# Altium PCB xlrconn.PCBDOC
Units mil, origin at the board's own origin, x right, y up, seen from the top; angles counter-clockwise.
Board outline 2020 x 3120 mil, 2 copper layers (Top Layer, Bottom Layer); 21 components, 21 nets, 72 pads, 1 vias.
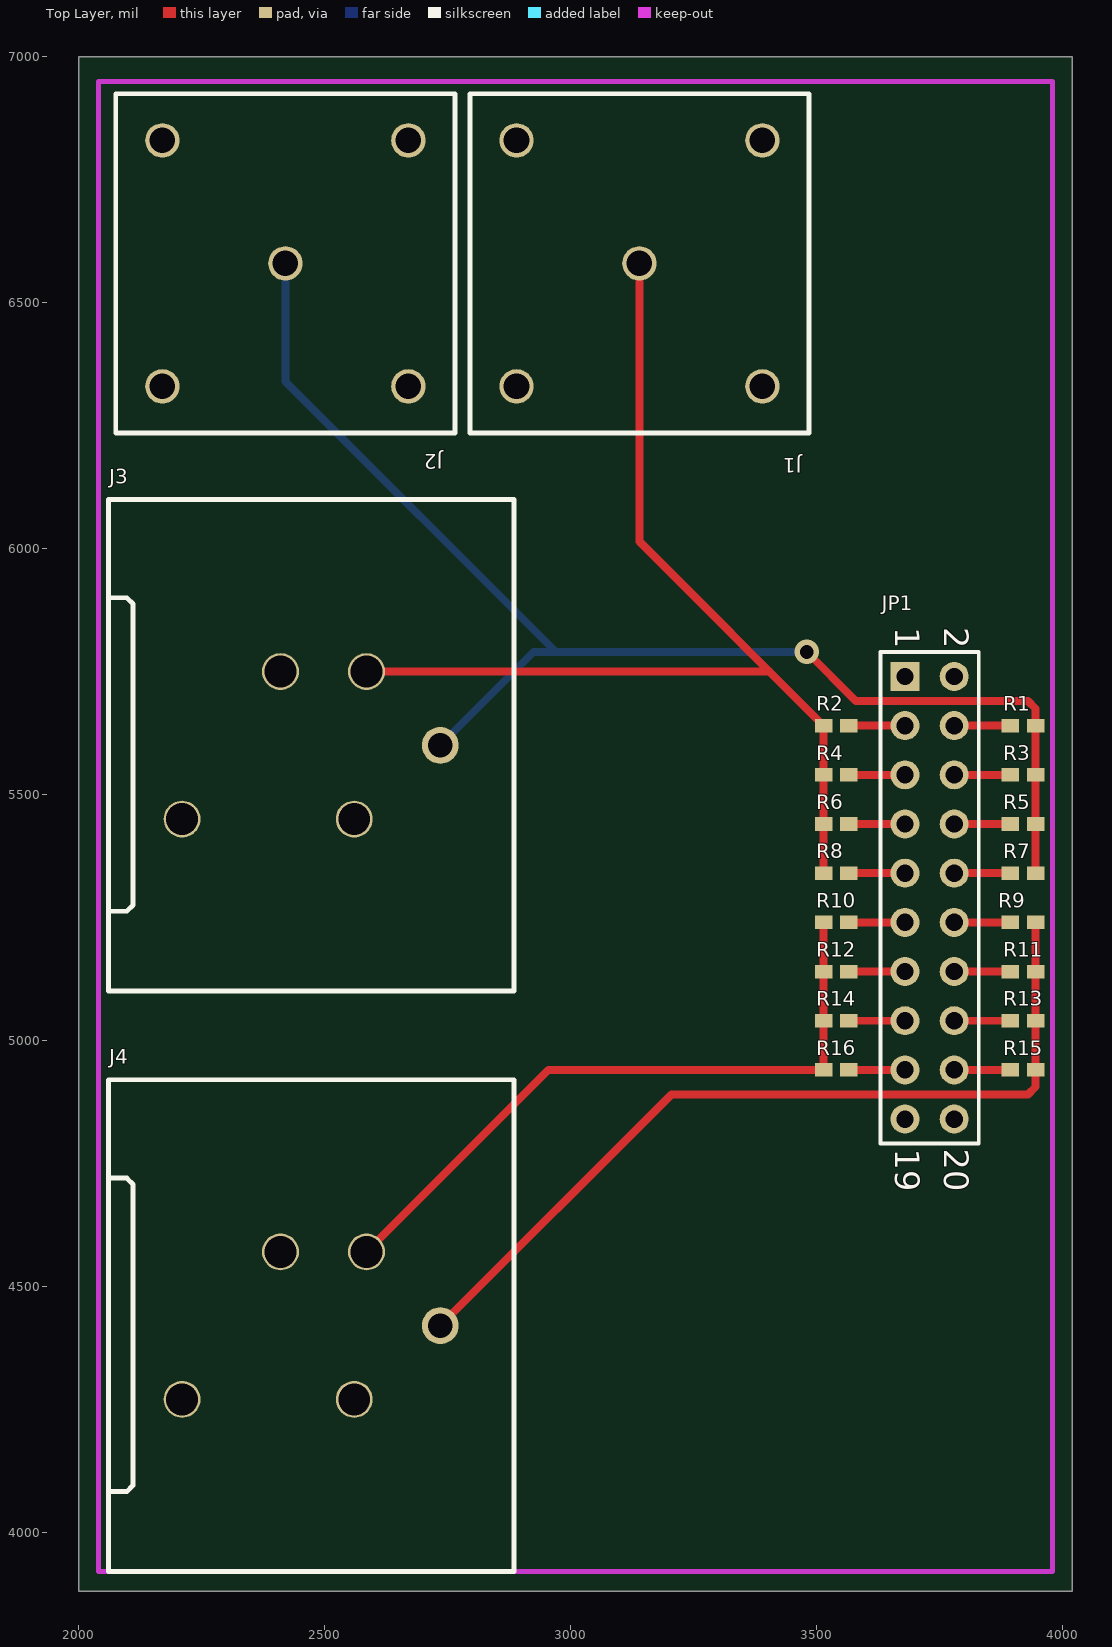
[diagram p0: Top Layer view]
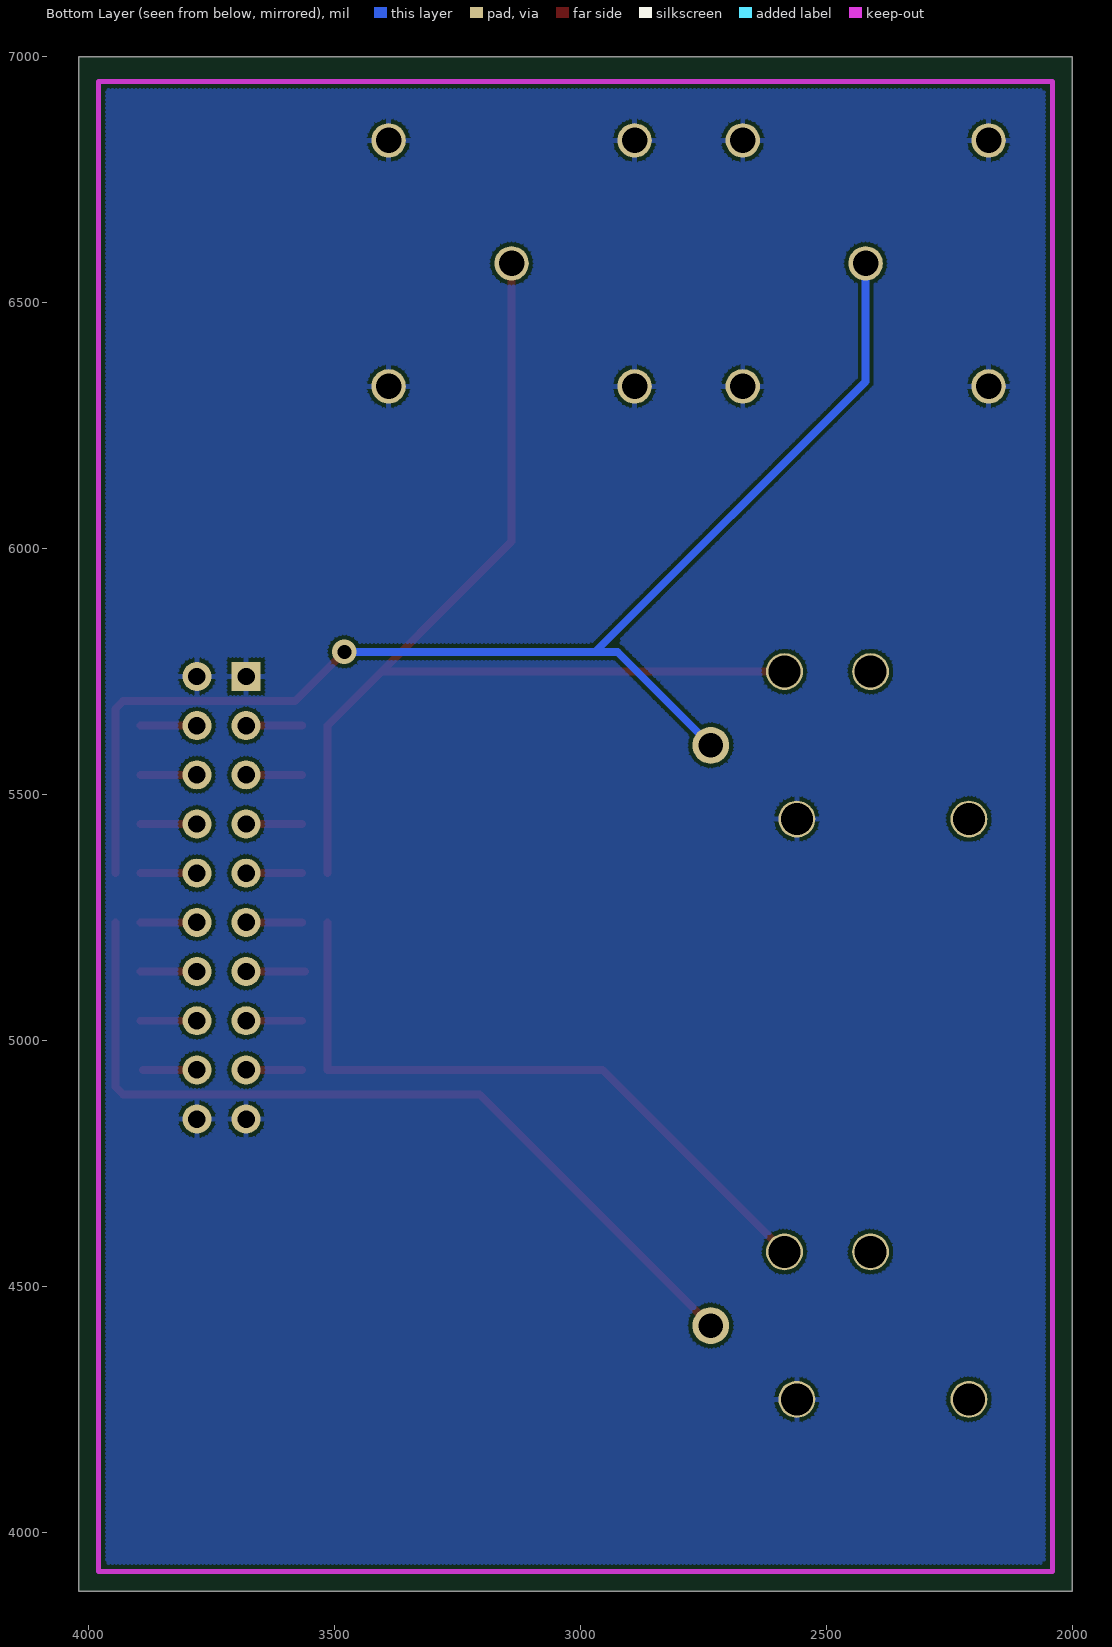
[diagram p1: Bottom Layer view, seen from below]

## Layer stack, top to bottom
Top Layer: signal copper 1.4
Dielectric: dielectric 12.6, FR-4, Dk 4.8
Bottom Layer: signal copper 1.4

## Board outline
2000,3880 4020,3880 4020,7000 2000,7000

## Design rules (kind name [scope] priority, off if disabled: settings)
Clearance [All] p1: gap=8
ComponentClearance [All] p1: gap=10 collisioncheckmode=0 verticalgap=10
PolygonConnect [All] p1: connectstyle=Relief reliefconductorwidth=10 reliefentries=4 polygonreliefangle="90 Angle"
RoomDefinition xlrconn [InComponentClass('xlrconn')] p1: confinementstyle=ConfineIn formatcopy=TRUE lockcomponents=FALSE outline 3820,6688 3740,6688 3740,4400 3820,4400
RoutingVias [All] p1: holewidth=28 width=50 viastyle="Through Hole" minholewidth=28 minwidth=50 maxholewidth=28 maxwidth=50
SolderMaskExpansion [All] p1: expansion=4
TestPointUsage [All] p1: valid=0 allowmultiple=FALSE
Testpoint [All] p1: side=15 testpointundercomponent=TRUE minsize=40 maxsize=100 preferedsize=60 minholesize=0 maxholesize=40 preferedholesize=32 testpointgrid=1 style=1023 order=0-123456789
Width [All] p1: maxlimit=50 minlimit=8 preferedwidth=8 toplayer_prefwidth=16 bottomlayer_prefwidth=16 minimp=50.000000 maximp=50.000000 favimp=50.000000
17 further rules are at their usual default settings.

## Components (designator, comment, footprint, x,y, rotation, side; value= is the part's Value field where it differs from the comment)
J1 "Vertical BNC" "Vertical BNC 227699-1" 3140,6580 r0 top
J2 "Vertical BNC" "Vertical BNC 227699-1" 2420,6580 r0 top
J3 "XLR connector" NC3FAH-0 2060,5600 r90 top
J4 "XLR connector" NC3FAH-0 2060,4420 r90 top
JP1 "Header 10X2" HDR2X10 3680,5740 r270 top
R1 "0" CR1005-0402 3920,5640 r180 top
R2 "0" CR1005-0402 3540,5640 r180 top
R3 "0" CR1005-0402 3920,5540 r180 top
R4 "0" CR1005-0402 3540,5540 r180 top
R5 "0" CR1005-0402 3920,5440 r180 top
R6 "0" CR1005-0402 3540,5440 r180 top
R7 "0" CR1005-0402 3920,5340 r180 top
R8 "0" CR1005-0402 3540,5340 r180 top
R9 "0" CR1005-0402 3920,5240 r180 top
R10 "0" CR1005-0402 3540,5240 r180 top
R11 "0" CR1005-0402 3920,5140 r180 top
R12 "0" CR1005-0402 3540,5140 r180 top
R13 "0" CR1005-0402 3920,5040 r180 top
R14 "0" CR1005-0402 3540,5040 r180 top
R15 "0" CR1005-0402 3920,4940 r180 top
R16 "0" CR1005-0402 3540,4940 r180 top

## Footprints (in the part's own frame and the unit in brackets; to place one, negate y for a bottom-side part, rotate by r counter-clockwise, add the part's x,y. Pads: shape width x height; smd on the part's side, far side on the other; paste and mask are expansions set on the pad)
CR1005-0402 [mm] "Chip Resistor; Body 1.1 x 0.5 mm (LxW typ)"
  rect 0.9x0.7 smd: 1(-0.65,0) 2(0.65,0)
HDR2X10 [mm]
  rect 1.5x1.5 hole 0.9: 1(0,0)
  round 1.5 hole 0.9: 2(0,2.54) 3(2.54,0) 4(2.54,2.54) 5(5.08,0) 6(5.08,2.54) 7(7.62,0) 8(7.62,2.54) 9(10.16,0) 10(10.16,2.54) 11(12.7,0) 12(12.7,2.54) 13(15.24,0) 14(15.24,2.54) 15(17.78,0) 16(17.78,2.54) 17(20.32,0) 18(20.32,2.54) 19(22.86,0) 20(22.86,2.54)
  silkscreen extent -1.27,-1.27 24.13,3.81
NC3FAH-0 [mil] "Neutrik 3 pole female XLR receptacle, plastic housing, horizontal PCB mount."
  round 75 hole 65: 0(-150,-150) 0(150,-350) 1(-150,-500) 2(150,-525)
  round 75 hole 50: 3(0,-675)
  silkscreen extent -500,-825 500,0
"Vertical BNC 227699-1" [mil] "AMP vertical BNC 227699-1"
  round 70 hole 52: 1(0,0) 2(250,250) 3(-250,250) 4(-250,-250) 5(250,-250)
  silkscreen extent -345,-345 345,345

## Part data
J1 J2: library part VERTBNC, "Vertical BNC with correct grounding pin behavior"
J3 J4: library part XLR, "XLR balanced connector, standard"
JP1: "Header, 10-Pin, Dual row"
R1 R2 R3 R4 R5 R6 R7 R8 R9 R10 R11 R12 R13 R14 R15 R16: library part Res1, "Resistor"

## Via types
v1: diameter 50, hole 28, Top Layer to Bottom Layer, 1 vias

## Nets (pads, with @x,y where several pads share a name; then routed paths per layer and width w, separated by ;. In a path a pad name is that pad's centre, name@x,y a point inside that pad or via, vN(x,y) a via of type N, cw(c..) or ccw(c..) an arc to the next point about the centre after c; other vN are vias at no path point)
A+: J1.1 J3.2 R2.2 R4.2 R6.2 R8.2 | length 2214.5
  Top Layer w16: J3.2 3404.41,5750 ; J1.1 3140,6014.41 R2.2 R8.2
A-: J2.1 J3.3 R1.1 R3.1 R5.1 R7.1 | length 2689.4
  Top Layer w16: v1(3480,5790) 3580,5690 3930,5690 3945.59,5674.41 R7.1
  Bottom Layer w16: J2.1 2420,6340 2970,5790 ; J3.3 2925,5790 v1(3480,5790)
B+: J4.2 R10.2 R12.2 R14.2 R16.2 | length 1382.7
  Top Layer w16: J4.2 2955,4940 R16.2 R10.2
B-: J4.3 R9.1 R11.1 R13.1 R15.1 | length 1746.1
  Top Layer w16: J4.3 3205,4890 3930,4890 3945.59,4905.59 R9.1
GND: J1.2 J1.3 J1.4 J1.5 J2.2 J2.3 J2.4 J2.5 J3.1 J4.1 JP1.1 JP1.2 JP1.19 JP1.20
NetJP1_3: JP1.3 R2.1 | length 114.4
  Top Layer w16: R2.1 JP1.3
NetJP1_4: JP1.4 R1.2 | length 114.4
  Top Layer w16: JP1.4 R1.2
NetJP1_5: JP1.5 R4.1 | length 114.4
  Top Layer w16: R4.1 JP1.5
NetJP1_6: JP1.6 R3.2 | length 124.4
  Top Layer w16: JP1.6@3770,5540 R3.2
NetJP1_7: JP1.7 R6.1 | length 124.4
  Top Layer w16: R6.1 JP1.7@3690,5440
NetJP1_8: JP1.8 R5.2 | length 114.4
  Top Layer w16: JP1.8 R5.2
NetJP1_9: JP1.9 R8.1 | length 114.4
  Top Layer w16: R8.1 JP1.9
NetJP1_10: JP1.10 R7.2 | length 114.4
  Top Layer w16: JP1.10 R7.2
NetJP1_11: JP1.11 R10.1 | length 114.4
  Top Layer w16: R10.1 JP1.11
NetJP1_12: JP1.12 R9.2 | length 114.4
  Top Layer w16: JP1.12 R9.2
NetJP1_13: JP1.13 R12.1 | length 120
  Top Layer w16: R12.1@3560,5140 JP1.13
NetJP1_14: JP1.14 R11.2 | length 114.4
  Top Layer w16: JP1.14 R11.2
NetJP1_15: JP1.15 R14.1 | length 124.4
  Top Layer w16: R14.1 JP1.15@3690,5040
NetJP1_16: JP1.16 R13.2 | length 114.4
  Top Layer w16: JP1.16 R13.2
NetJP1_17: JP1.17 R16.1 | length 114.4
  Top Layer w16: R16.1 JP1.17
NetJP1_18: JP1.18 R15.2 | length 110
  Top Layer w16: JP1.18 R15.2@3890,4940
pads on no net: J3.0 J4.0

## Polygon pours and split planes (outlines as drawn)
GND on Bottom Layer (hatched 90Degree grid 8 track 8, remove dead copper): 3980,6950 3980,3920 2040,3920 2040,6950

## Keep-outs
Keep-Out Layer:
  lines w10: 2040,3920 2040,6950 3980,6950 3980,3920 2040,3920

## Other copper
Top Layer:
  text "Layer 1" at 4400,4770 h60
Bottom Layer:
  text "Layer 2" at 4390,4670 h60

## Silkscreen, mask and mechanical layers (free items; w line width, h text height)
Mechanical 5:
  the board outline again, w1
Drill Drawing:
  text ".LEGEND" at 6200,3200 h60
  text "Drill Drawing." at 6200,3100 h60

## Dimensions
2040,3920 to 3980,3920 on Mechanical 1
2040,3920 to 2040,6950 on Mechanical 1

## Text inside footprints (layer, text, board x,y; h text height)
JP1: Top Overlay "2" at 3760,5840 h50 r270; Top Overlay "1" at 3660,5840 h50 r270; Top Overlay "19" at 3660,4780 h50 r270; Top Overlay "20" at 3760,4780 h50 r270